# Altium PCB VNA.PcbDoc
Units mm, origin at the board's own origin, x right, y up, seen from the top; angles counter-clockwise.
Board outline 42.58 x 45.09 mm, 4 copper layers (Top Layer, Internal Plane 1, Signal Layer 1, Bottom Layer), stack 0.72 mm thick; 9 components, 10 nets, 18 pads, 0 vias.
Unrouted connection lines stored in the file: 4.
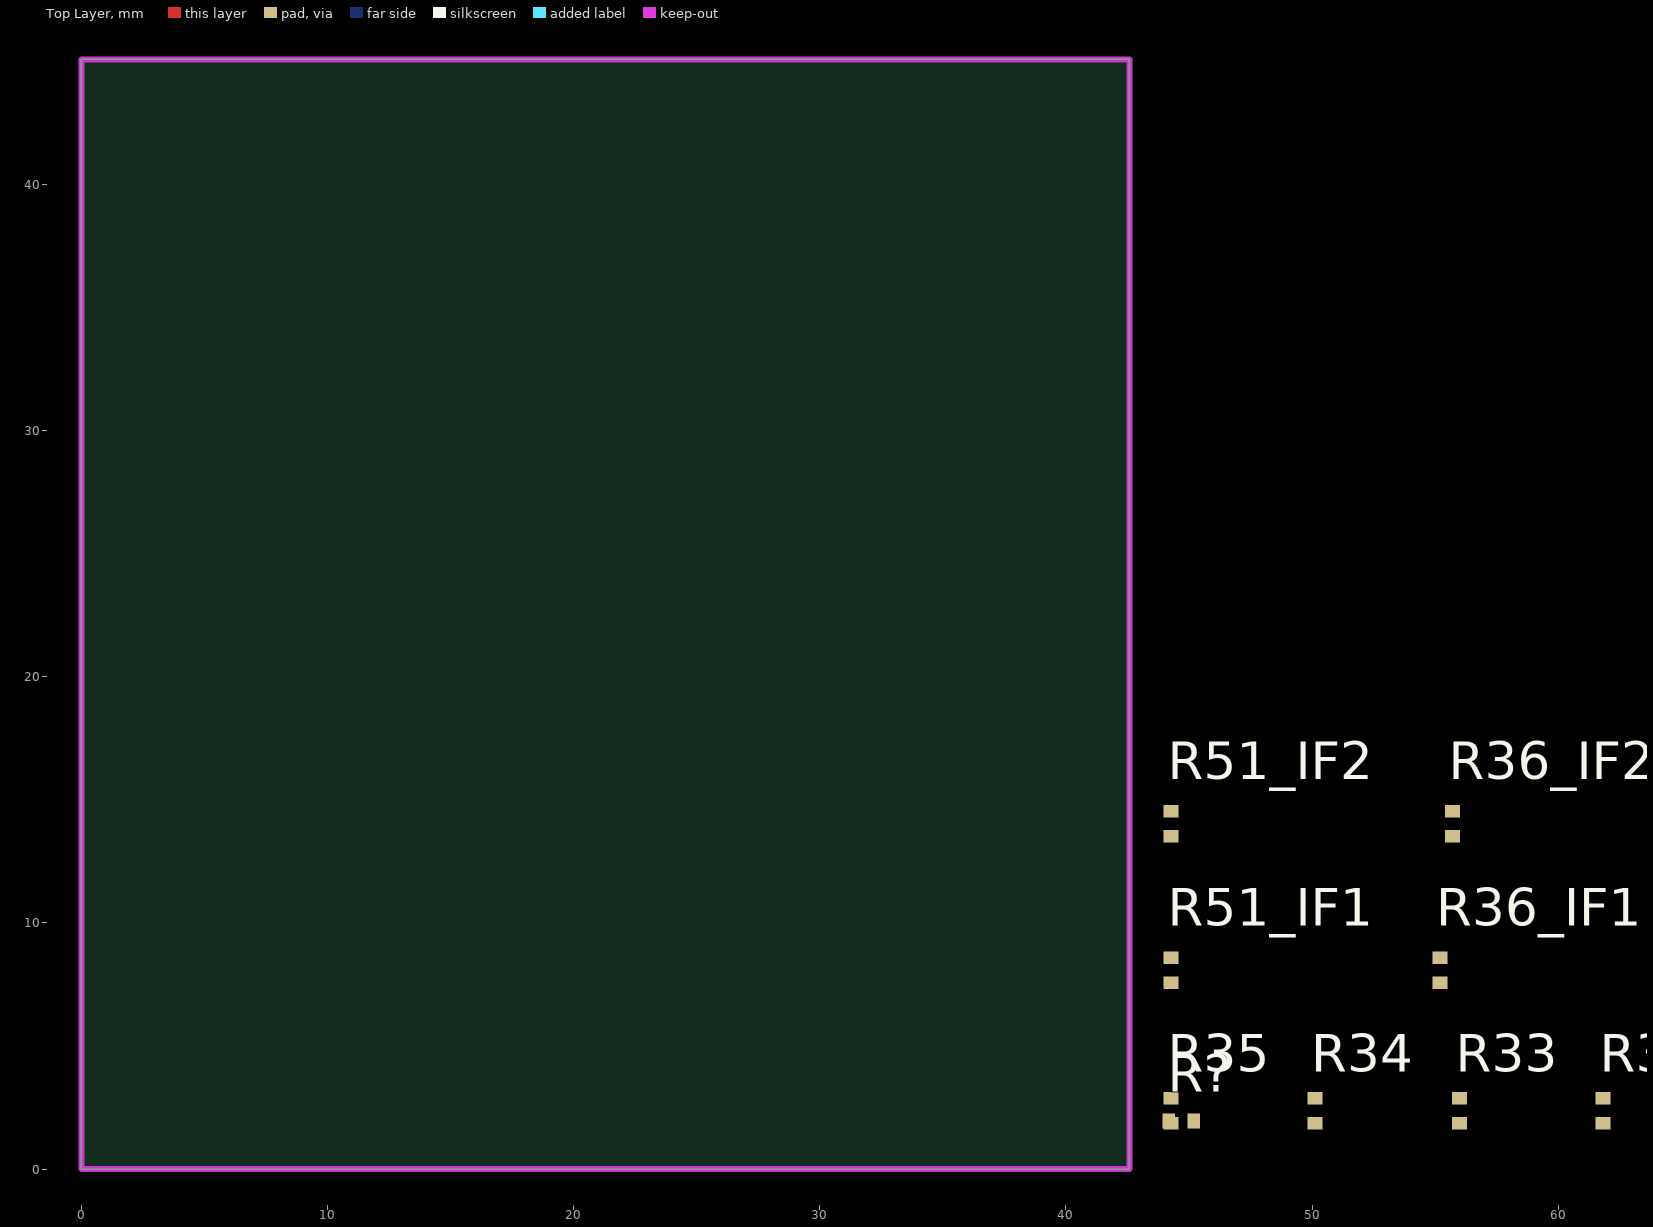
[diagram p0: Top Layer view]
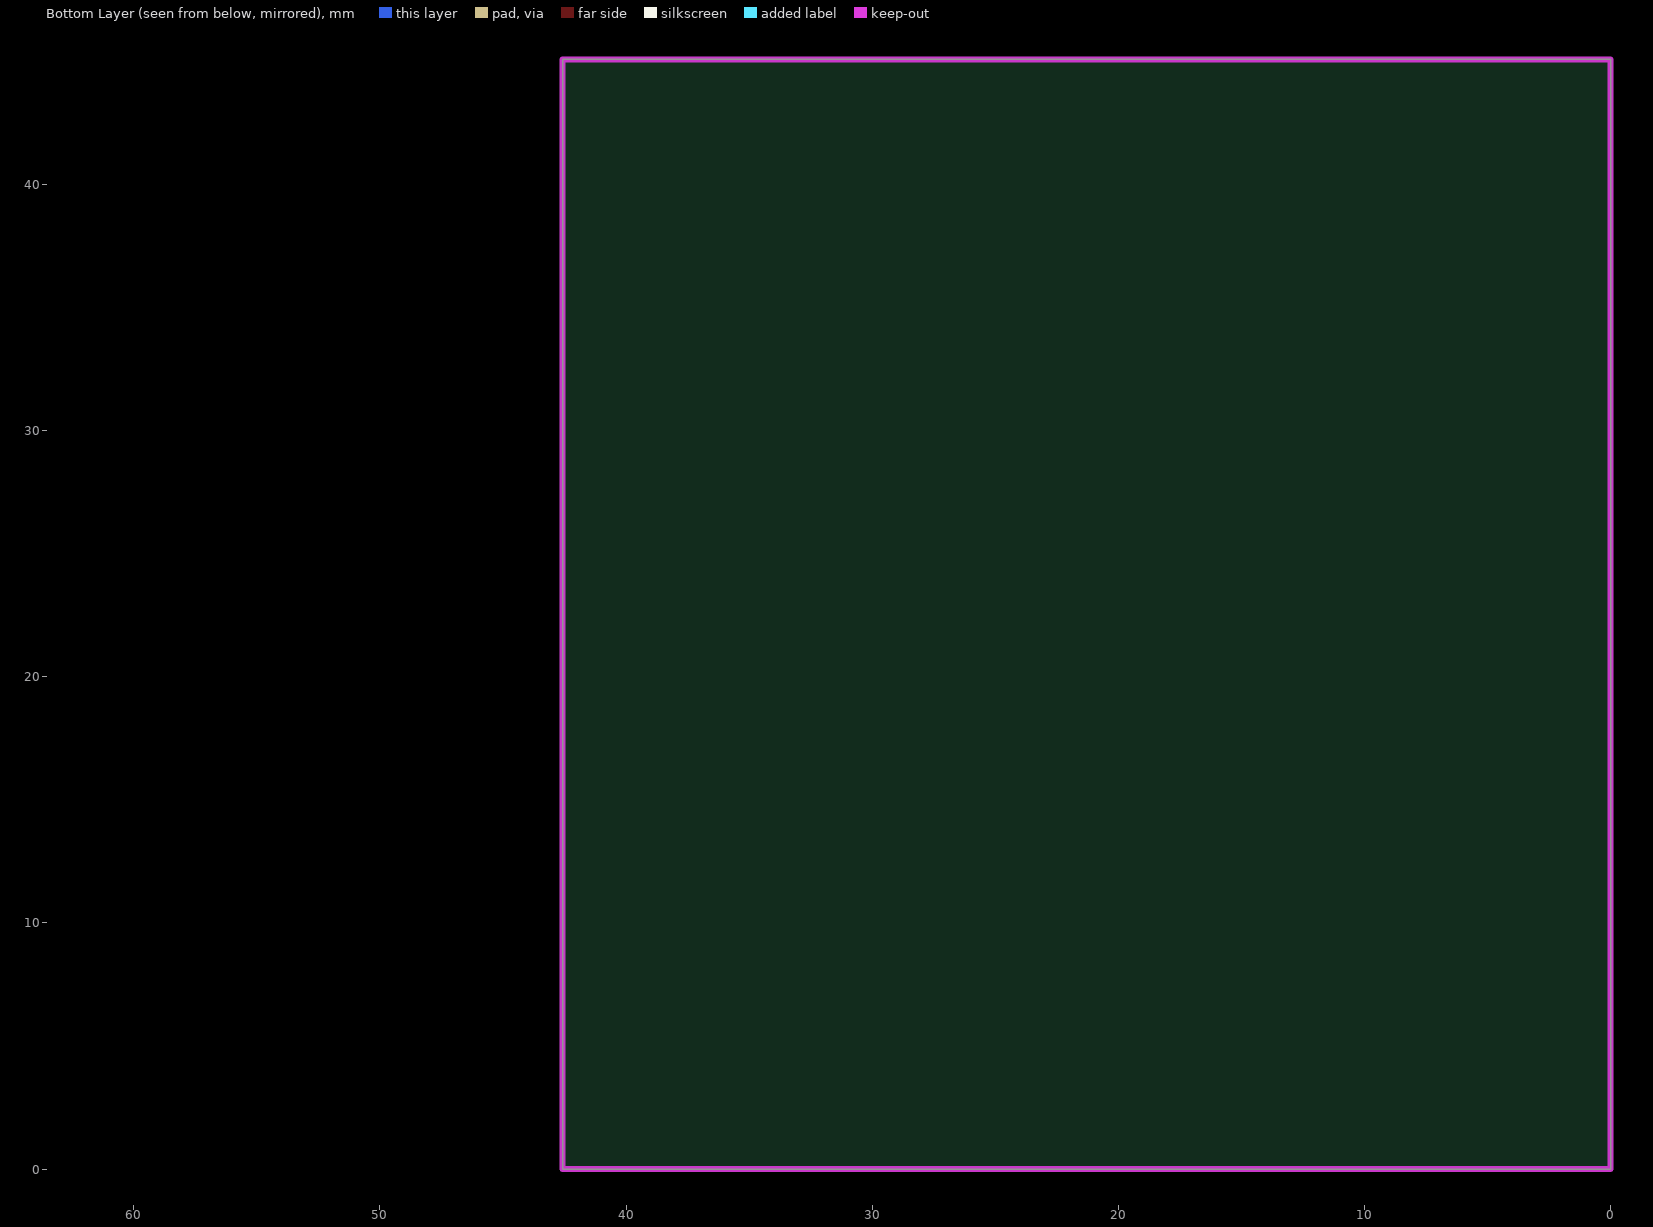
[diagram p1: Bottom Layer view, seen from below]
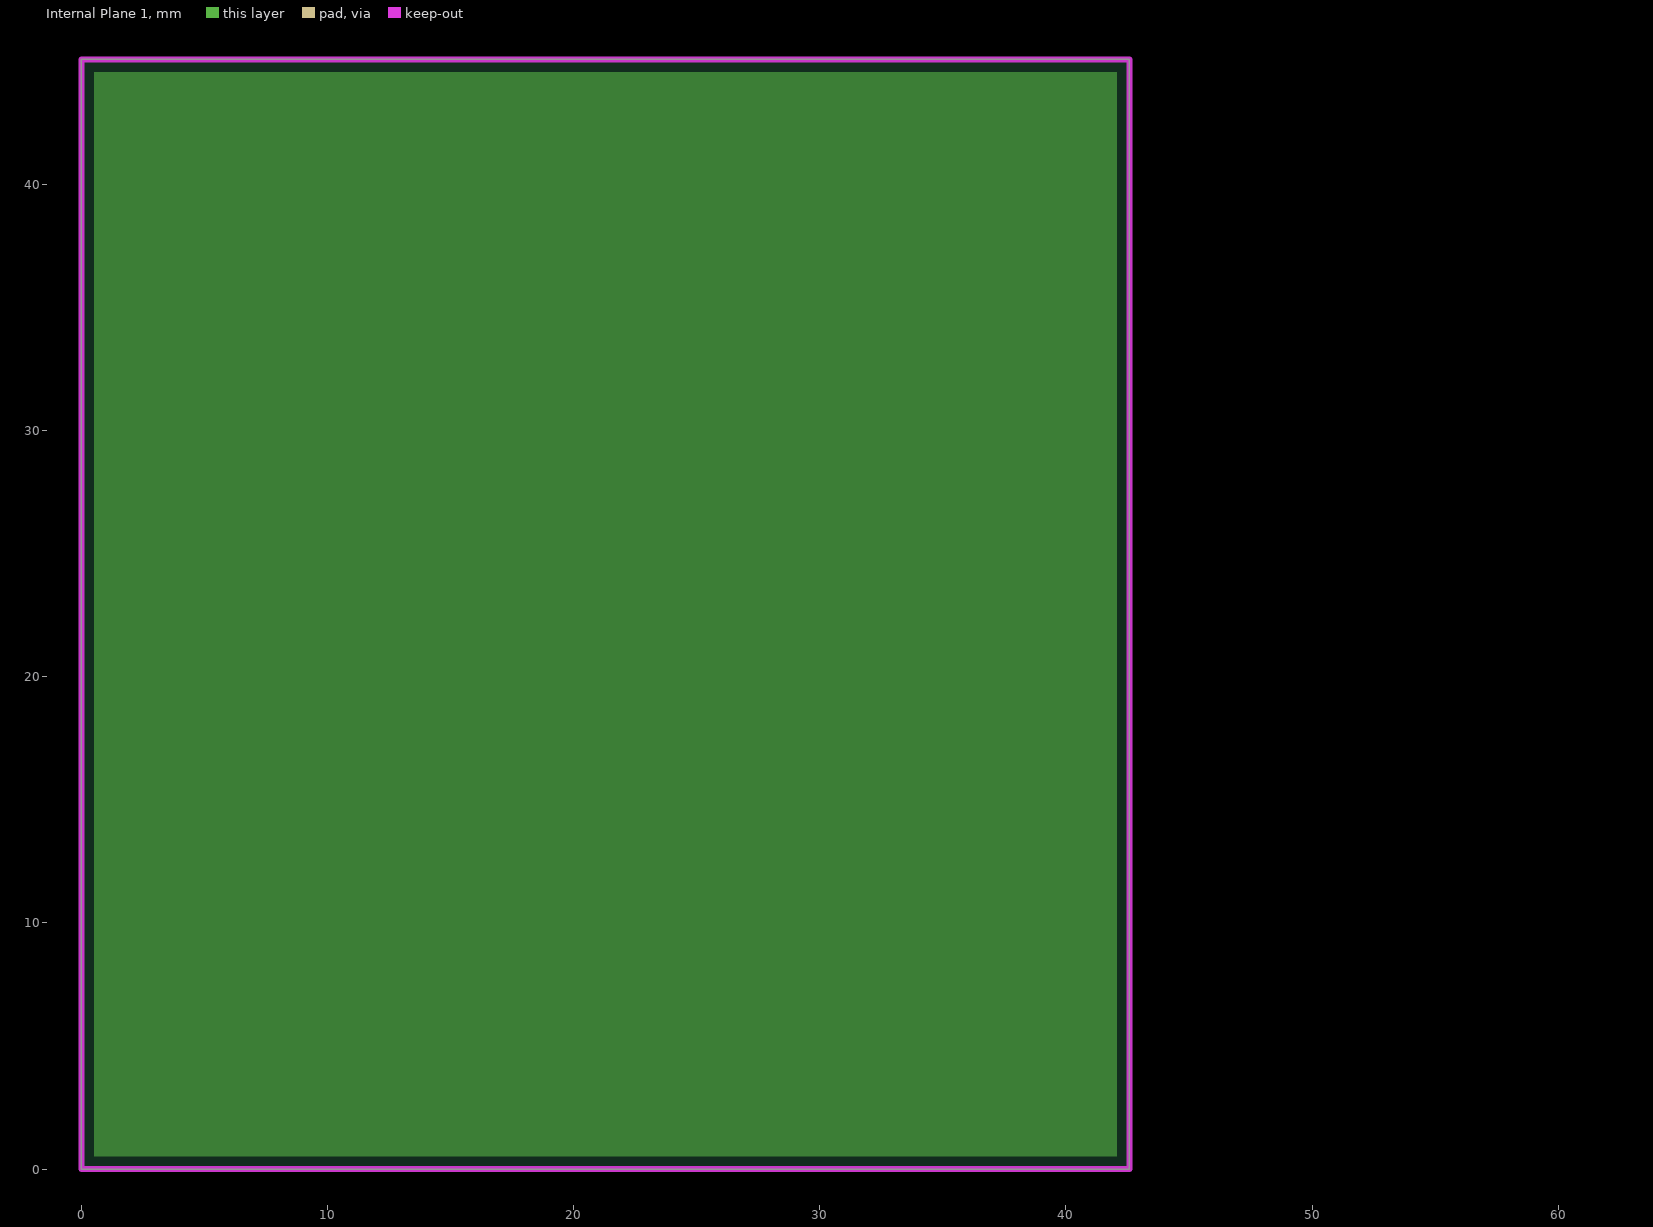
[diagram p2: Internal Plane 1, clearances drawn from the general rule]

## Layer stack, top to bottom
Top Solder: solder mask 0.0102, Solder Resist, Dk 3.5
Top Layer: signal copper 0.0356
Dielectric 1: core 0.196, FR-4, Dk 4.2
Internal Plane 1: plane copper 0.036
Dielectric 4: prepreg 0.127, Dk 4.2
Signal Layer 1: signal copper 0.036
Dielectric 3: core 0.254, Dk 4.2
Bottom Layer: signal copper 0.0356
Bottom Solder: solder mask 0.0102, Solder Resist, Dk 3.5

## Board outline
0,0 42.581,0 42.581,45.085 0,45.085

## Design rules (kind name [scope] priority, off if disabled: settings)
Clearance PowerPour [InPolygon AND (InNet('1.8D') OR InNet('1.2') OR InNet('3.3D'))] p1: gap=0.152
Clearance "50R trace" [InNetClass('50R') vs InPolygon] p2: gap=0.508
Clearance [All] p3: gap=0.152
DiffPairsRouting USB_HS_1 [InNet('USB_HS_P')     or InNet('USB_HS_N')] p1: maxlimit=0.254 minlimit=0.152 mostfreqgap=0.152 toplayer_minwidth=0.254 toplayer_maxwidth=0.381 toplayer_prefwidth=0.381 midlayer1_minwidth=0.305 midlayer1_maxwidth=0.381 midlayer1_prefwidth=0.381 bottomlayer_minwidth=0.254 bottomlayer_maxwidth=0.381 bottomlayer_prefwidth=0.381 maxuncoupledlength=12.7
DiffPairsRouting [All] p2: maxlimit=0.254 minlimit=0.152 mostfreqgap=0.203 toplayer_minwidth=0.152 toplayer_maxwidth=0.381 toplayer_prefwidth=0.254 midlayer1_minwidth=0.152 midlayer1_maxwidth=0.381 midlayer1_prefwidth=0.254 bottomlayer_minwidth=0.152 bottomlayer_maxwidth=0.381 bottomlayer_prefwidth=0.254 maxuncoupledlength=12.7
HoleToHoleClearance [All] p1: gap=0.2 allowstackedmicrovias=TRUE
MatchedLengths [InNet('USB_HS_P') or InNet('USB_HS_N')] p1: tolerance=1.27 checknetsindiffpair=TRUE checkdiffpairvsdiffpair=FALSE checkothers=FALSE
MinimumSolderMaskSliver [All] p1 off: minsoldermaskwidth=0.254
PlaneClearance [All] p1: clearance=0.152
PlaneConnect [All] p1: planeconnectstyle=Direct reliefexpansion=0.508 reliefentries=4 reliefconductorwidth=0.254 reliefairgap=0.254
PolygonConnect [All] p1: connectstyle=Direct reliefconductorwidth=0.254 reliefentries=4 polygonreliefangle="90 Angle" airgapwidth=0.254
RoomDefinition channel [InComponentClass('channel')] p1: confinementstyle=ConfineIn formatcopy=TRUE lockcomponents=FALSE outline 43.739,1.422 47.066,1.422 47.066,5.055 43.739,5.055
RoomDefinition Designator [InComponentClass('Designator')] p2: confinementstyle=ConfineIn formatcopy=TRUE lockcomponents=FALSE outline 43.739,1.422 66.142,1.422 66.142,5.867 43.739,5.867
RoomDefinition IF1 [InComponentClass('IF1')] p3 off: confinementstyle=ConfineIn formatcopy=TRUE lockcomponents=FALSE outline -77.419,-70.739 -26.619,-70.739 -26.619,-45.339 -77.419,-45.339
RoomDefinition IF2 [InComponentClass('IF2')] p4 off: confinementstyle=ConfineIn formatcopy=TRUE lockcomponents=FALSE outline -77.419,-70.739 -26.619,-70.739 -26.619,-45.339 -77.419,-45.339
RoutingVias [All] p1: holewidth=0.3 width=0.45 viastyle="Through Hole" minholewidth=0.2 minwidth=0.45 maxholewidth=0.711 maxwidth=1.27
ShortCircuit ShortCircuit_NoNet [not InAnyNet vs not InAnyNet] p1: allowed=TRUE
ShortCircuit [not InNet('No Net') vs not InNet('No Net')] p2: allowed=FALSE
SilkToBoardRegionClearance [All] p1 off:
SilkToSilkClearance [All] p1 off: silktosilkclearance=0.254
SilkToSolderMaskClearance [IsPad] p1 off: minsilkscreentomaskgap=0.254 clearancetoexposedcopper=TRUE
SolderMaskExpansion [All] p1: expansion=0.051
UnpouredPolygon [All] p1: allowunpoured=FALSE
Width Width_1 [InNetClass('50R')] p1: maxlimit=0.752 minlimit=0.134 preferedwidth=0.64 toplayer_minwidth=0.232 toplayer_maxwidth=0.33 toplayer_prefwidth=0.277 midlayer1_maxwidth=0.198 midlayer1_prefwidth=0.164 bottomlayer_minwidth=0.544 impedancedriven=TRUE minimp=45.000000 maximp=55.000000 favimp=50.000000
Width [All] p2: maxlimit=1.524 minlimit=0.152 preferedwidth=0.152
20 further rules are at their usual default settings.

## Classes and differential pairs
channel class LNA: LNA21 LNA22
component class Designator: R32 R33 R34 R35
component class IF1: R36_IF1 R51_IF1
component class IF2: R36_IF2 R51_IF2
channel class IF_amp: IF1 IF2
channel class mixer: mixer1 mixer2
channel class source: LO11 LO12
channel class Balun: B11 B12
channel class filter_bank: F1 F2
component class channel: R?

## Components (designator, comment, footprint, x,y, rotation, side; value= is the part's Value field where it differs from the comment)
R32 "1k" 0402 61.824,2.362 r90 top
R33 "1k" 0402 55.982,2.362 r90 top
R34 "1k" 0402 50.114,2.362 r90 top
R35 "1k" 0402 44.272,2.362 r90 top
R36_IF1 "1k" 0402 55.194,8.077 r90 top (schematic designator R36)
R36_IF2 "1k" 0402 55.702,14.021 r90 top (schematic designator R36)
R51_IF1 "1k" 0402 44.272,8.077 r90 top (schematic designator R51)
R51_IF2 "1k" 0402 44.272,14.021 r90 top (schematic designator R51)
R? "50" 0402 44.679,1.956 r0 top

## Footprints (in the part's own frame and the unit in brackets; to place one, negate y for a bottom-side part, rotate by r counter-clockwise, add the part's x,y. Pads: shape width x height; smd on the part's side, far side on the other; paste and mask are expansions set on the pad)
0402 [mil] "0402-RES"
  rect 20x24 smd: 1(-19.68,0) 2(20,0)

## Part data
R32 R33 R34 R35 R36_IF1 R36_IF2 R51_IF1 R51_IF2 R?: library part Res2, "Resistor"

## Nets (pads, with @x,y where several pads share a name; then routed paths per layer and width w, separated by ;. In a path a pad name is that pad's centre, name@x,y a point inside that pad or via, vN(x,y) a via of type N, cw(c..) or ccw(c..) an arc to the next point about the centre after c; other vN are vias at no path point)
GND: R?.2
NetR32_2: R32.2 R36_IF1.1
NetR33_2: R33.2 R51_IF1.1
NetR34_2: R34.2 R36_IF2.1
NetR35_2: R35.2 R51_IF2.1
NetR36_IF1_2: R36_IF1.2
NetR36_IF2_2: R36_IF2.2
NetR51_IF1_2: R51_IF1.2
NetR51_IF2_2: R51_IF2.2
NetR?_1: R?.1
pads on no net: R32.1 R33.1 R34.1 R35.1

## Polygon pours and split planes (outlines as drawn)
no net on Internal Plane 1 (split plane): 42.07,0.51 0.51,0.51 0.51,44.575 42.07,44.575

## Keep-outs
Keep-Out Layer:
  the board outline again, w0.254